# Altium PCB lab04.PcbDoc
Units mil, origin at the board's own origin, x right, y up, seen from the top; angles counter-clockwise.
Board outline 10810 x 8548.37 mil, 2 copper layers (Top Layer, Top, Bottom Layer, Bottom); 14 components, 13 nets, 42 pads, 0 vias.
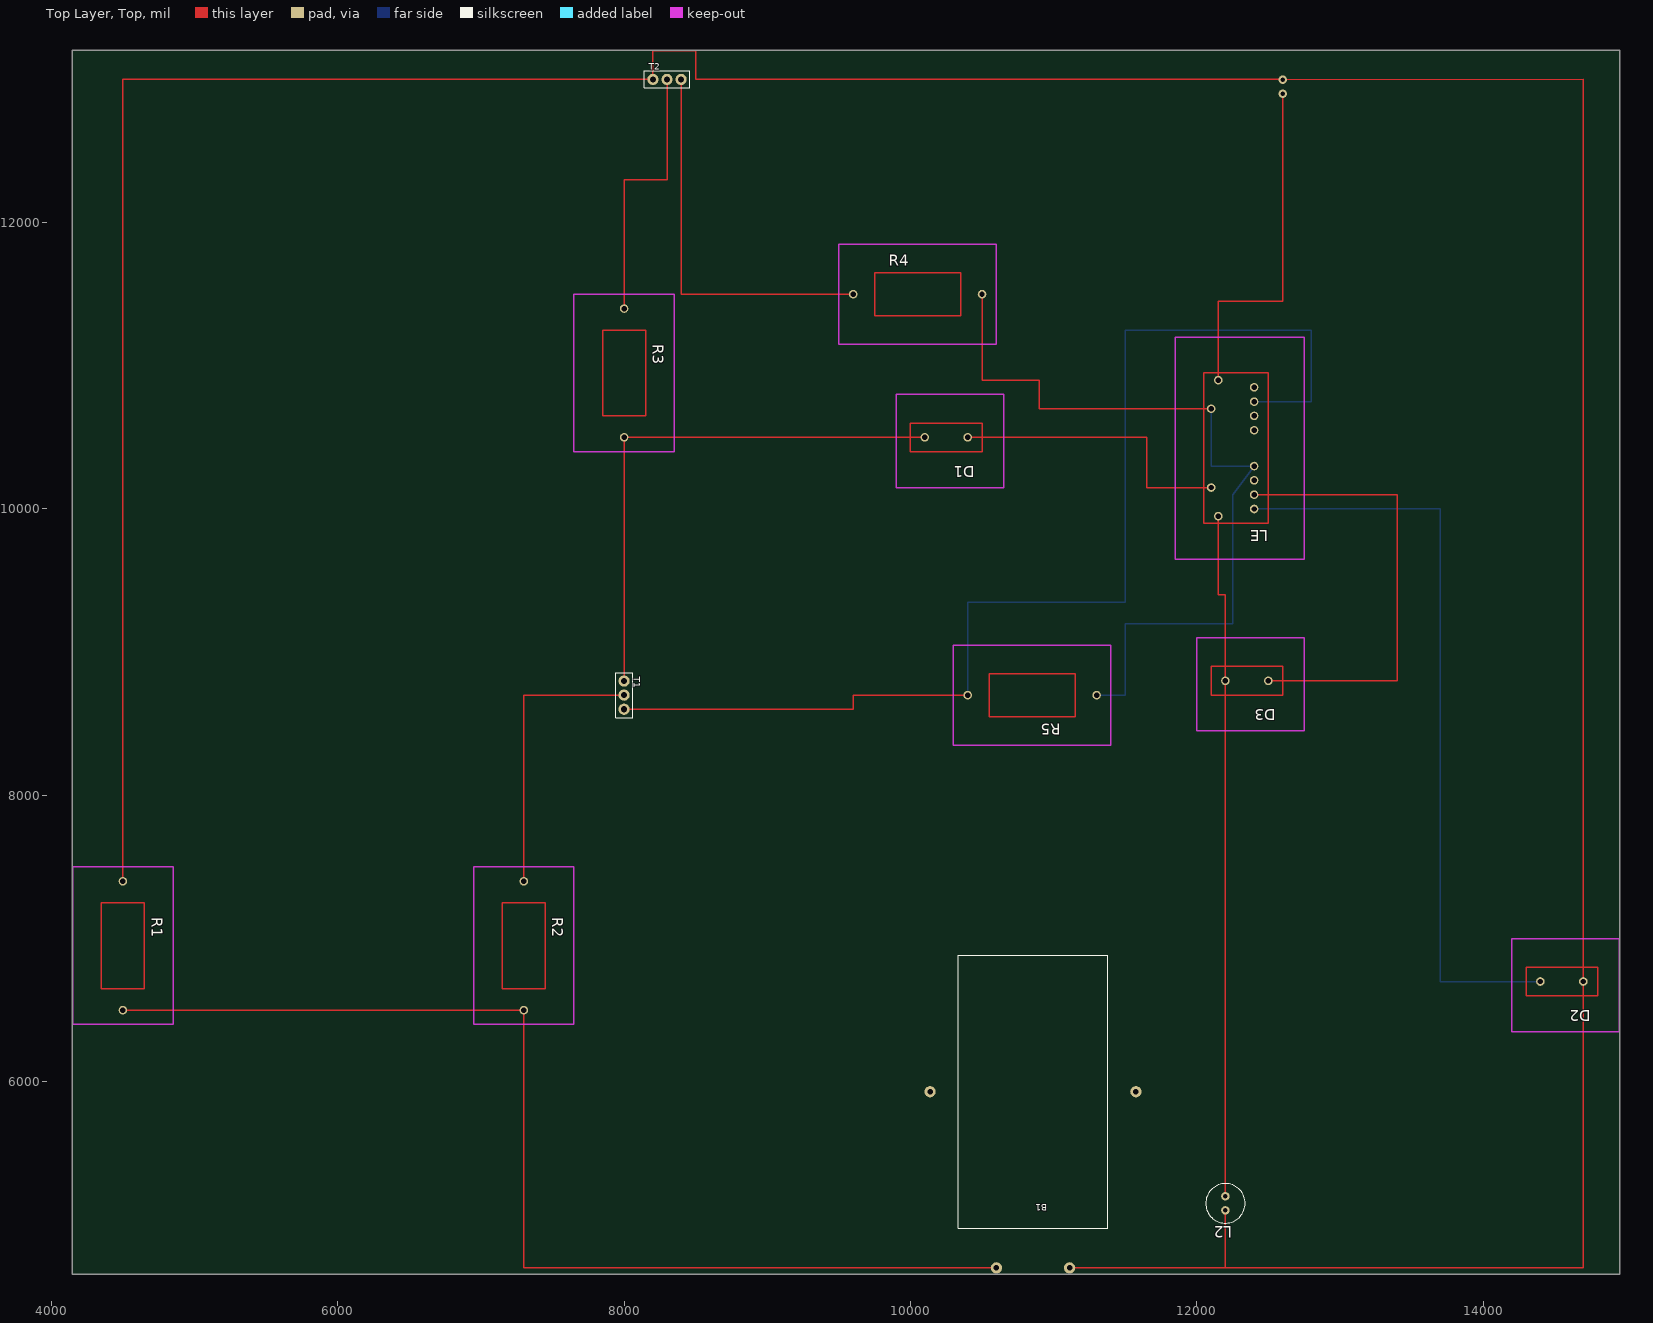
[diagram p0: Top Layer, Top view]
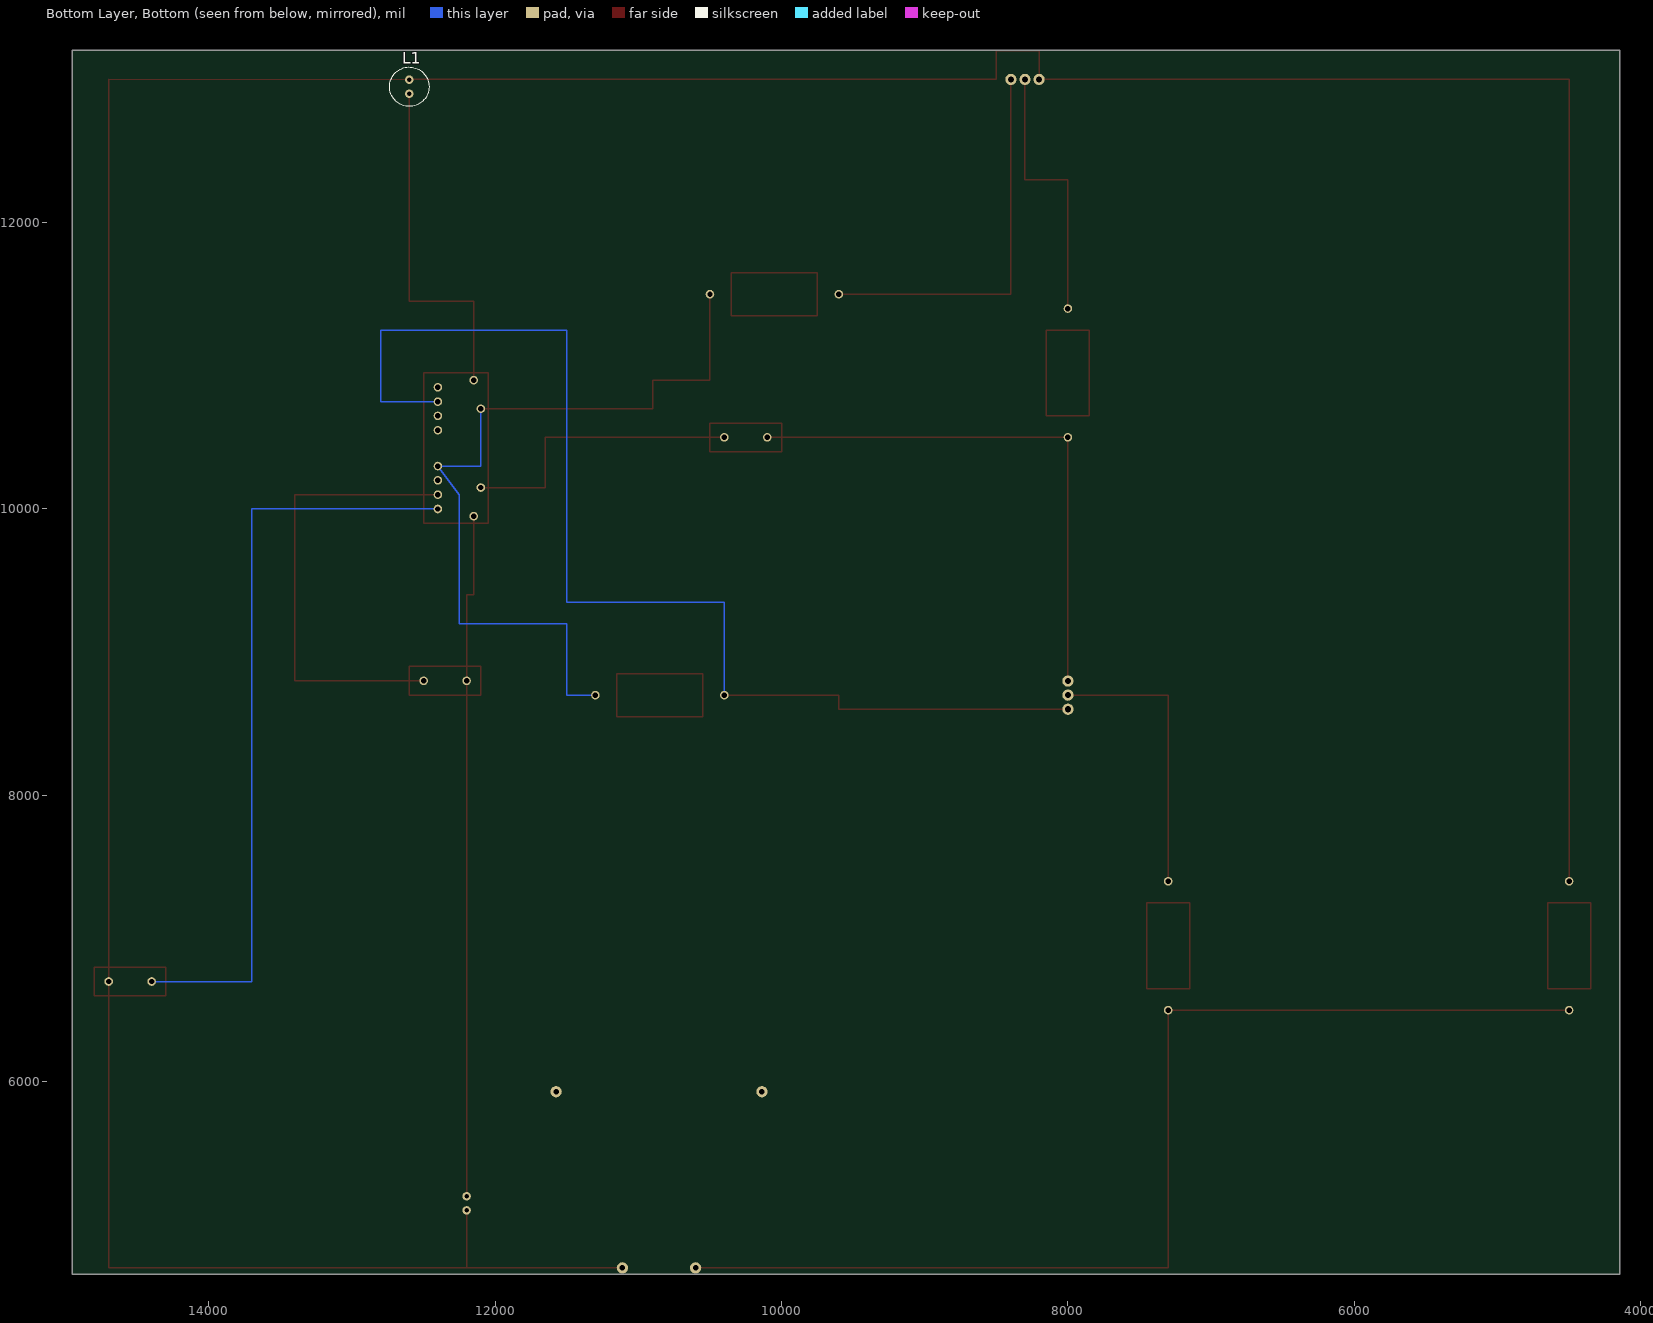
[diagram p1: Bottom Layer, Bottom view, seen from below]

## Layer stack, top to bottom
Top Solder, Top Mask: solder mask 0.4, Solder Resist, Dk 3.5
Top Layer, Top: signal copper 1.4
Dielectric 1: dielectric 12.6, FR-4, Dk 4.8
Bottom Layer, Bottom: signal copper 1.4
Bottom Solder, Bot Mask: solder mask 0.4, Solder Resist, Dk 3.5

## Board outline
4145,4656.63 14955,4656.63 14955,13205 4145,13205

## Design rules (kind name [scope] priority, off if disabled: settings)
Clearance [All] p1: gap=10 ignorepadtopadclearanceinfootprint=FALSE except(0: Arc-Hole Track-Hole SMDPad-Hole THPad-Hole Via-Hole Fill-Hole Poly-Hole Region-Hole Text-Hole; 12: Arc-Arc Arc-Track Arc-THPad Arc-Via Track-Track Track-THPad Track-Via THPad-THPad THPad-Via Via-Via)
PlaneClearance [All] p1: clearance=10
PolygonConnect [All] p1: connectstyle=Relief reliefconductorwidth=10 reliefentries=4 polygonreliefangle="90 Angle" airgapwidth=10
RoutingVias [All] p1: holewidth=28 width=50 viastyle="Through Hole" minholewidth=28 minwidth=50 maxholewidth=28 maxwidth=50
SolderMaskExpansion [All] p1: expansion=4 istentingtop=FALSE
Width [All] p1: maxlimit=10 minlimit=10 preferedwidth=10
29 further rules are at their usual default settings.

## Components (designator, comment, footprint, x,y, rotation, side; value= is the part's Value field where it differs from the comment)
B1 "" KRONA_KRONA(Primary) 10600,4700 r180 top
D1 "" DIODE 10400,10500 r180 top
D2 "" DIODE 14700,6700 r180 top
D3 "" DIODE 12500,8800 r180 top
L1 "{Value}" HL_MINI 12600,12900 r180 bottom
L2 "{Value}" HL_MINI 12200,5200 r180 top
LE "" LOGICELEMENT_LOGICELEMENT(Primary) 12400,10000 r180 top
R1 "51k" RES 4500,6500 r270 top
R2 "1k" RES 7300,6500 r270 top
R3 "3k" RES 8000,10500 r270 top
R4 "200" RES 10500,11500 r0 top
R5 "200" RES 10400,8700 r180 top
T1 "" "KT-27 (2002)" 8000,8700 r270 top
T2 "" "KT-27 (2002)" 8300,13000 r0 top

## Footprints (in the part's own frame and the unit in brackets; to place one, negate y for a bottom-side part, rotate by r counter-clockwise, add the part's x,y. Pads: shape width x height; smd on the part's side, far side on the other; paste and mask are expansions set on the pad)
DIODE [mil]
  round 60 hole 38: 1(0,0) 2(300,0)
  Top Layer, Top keep-out lines w10: 500,350 -250,350 -250,-300 500,-300 500,350
HL_MINI [mm]
  round 1.5 hole 0.8: 1(0,0) 2(0,2.5)
  silkscreen extent -3.5,-2.25 3.5,4.75
KRONA_KRONA(Primary) [mm]
  round 2 hole 1: 1(11.75,-31.25) 2(-24.75,-31.25) minus(-13,0) plus(0,0)
  silkscreen extent -19.75,-55.5 6.75,-7
"KT-27 (2002)" [mm]
  round 2 hole 1.1: 1(-2.5,0) 2(0,0) 3(2.5,0)
  silkscreen extent -4,-1.5 4,1.5
LOGICELEMENT_LOGICELEMENT(Primary) [mil]
  round 60 hole 38: 1(0,-550) 2(0,-850) 4(300,-150) 5(0,-300) 6(250,50) 7(0,-750) 8(250,-900) 9(0,-200) 10(300,-700) 12(0,-650) 13(0,-100) 14(0,0)
  Top Layer, Top keep-out lines w10: 550,350 -350,350 -350,-1200 550,-1200 550,350
RES [mil]
  round 60 hole 38: 1(-900,0) 2(0,0)
  Top Layer, Top lines w10: -150,-150 -750,-150 -750,150 -150,150 -150,-150
  Top Layer, Top keep-out lines w10: 100,-350 -1000,-350 -1000,350 100,350 100,-350

## Nets (pads, with @x,y where several pads share a name; then routed paths per layer and width w, separated by ;. In a path a pad name is that pad's centre, name@x,y a point inside that pad or via, vN(x,y) a via of type N, cw(c..) or ccw(c..) an arc to the next point about the centre after c; other vN are vias at no path point)
NET00000: B1.plus R1.2 R2.2 | length 7900
  Top Layer, Top w10: R1.2 R2.2 7300,4700 B1.plus
NET00001: R2.1 T1.2 | length 2000
  Top Layer, Top w10: R2.1 7300,8700 T1.2
NET00002: D1.2 R3.2 T1.1 | length 5201.6
  Top Layer, Top w10: T1.1 R3.2 10000,10500 ; D1.2 10000,10500 ; 10000,10500 10000,10600 10500,10600 10500,10400 10000,10400 10000,10500
NET00003: R3.1 T2.2 | length 1900
  Top Layer, Top w10: R3.1 8000,12300 8300,12300 T2.2
NET00004: R4.1 T2.3 | length 2701.6
  Top Layer, Top w10: T2.3 8400,13000 8400,11500 R4.1
NET00006: D1.1 LE.4 | length 2050
  Top Layer, Top w10: D1.1 11650,10500 11650,10150 LE.4
NET00007: LE.5 LE.10 R4.2 R5.1 | length 5700
  Top Layer, Top w10: R4.2 10500,10900 10900,10900 10900,10700 LE.10
  Bottom Layer, Bottom w10: R5.1 11500,8700 11500,9200 12250,9200 12250,10100 LE.5 12100,10300 LE.10
NET00008: B1.minus D2.1 L1.2 L2.2 R1.1 T2.1 | length 29892.9
  Top Layer, Top w10: R1.1 4500,13000 T2.1@8200,13000 ; T2.1 T2.1@8200,13000 ; B1.minus 12200,4700 ; L2.2 12200,4700 ; T2.1@8200,13000 8200,13200 8500,13200 8500,13000 12600,13000 L1.2 14700,13000 14700,6800 ; 12200,4700 14700,4700 14700,6600 ; 14700,6600 14300,6600 14300,6800 14700,6800 ; 14700,6600 D2.1 14700,6800 ; 14700,6600 14800,6600 14800,6800 14700,6800
NET00009: D2.2 LE.14 | length 5300
  Bottom Layer, Bottom w10: LE.14 13700,10000 13700,6700 D2.2
NET00011: L1.1 LE.8 | length 5450
  Top Layer, Top w10: LE.8 12150,10950 ; L1.1 12600,11450 12150,11450 12150,10950 ; 12150,10950 12500,10950 12500,9900 12050,9900 12050,10950 12150,10950
NET00012: D3.2 L2.1 LE.6 | length 6200
  Top Layer, Top w10: LE.6 12150,9400 12200,9400 12200,8900 ; L2.1 12200,8700 ; 12200,8700 12600,8700 12600,8900 12200,8900 ; 12200,8700 D3.2 12200,8900 ; 12200,8700 12100,8700 12100,8900 12200,8900
NET00013: D3.1 LE.13 | length 3200
  Top Layer, Top w10: LE.13 13400,10100 13400,8800 D3.1
NET00014: LE.7 R5.2 T1.3 | length 8351.6
  Top Layer, Top w10: T1.3 8000,8600 9600,8600 9600,8700 R5.2
  Bottom Layer, Bottom w10: R5.2 10400,9350 11500,9350 11500,11250 12800,11250 12800,10750 LE.7
pads on no net: B1.1 B1.2 LE.1 LE.2 LE.9 LE.12